# Altium PCB rhd_board_rev1_right_rules_copy.PcbDoc
Units mm, origin at the board's own origin, x right, y up, seen from the top; angles counter-clockwise.
Board outline 12.85 x 20.85 mm, 3 copper layers (Top Layer, GND, Bottom layer), stack 0.13 mm thick; 28 components, 58 nets, 184 pads, 82 vias.
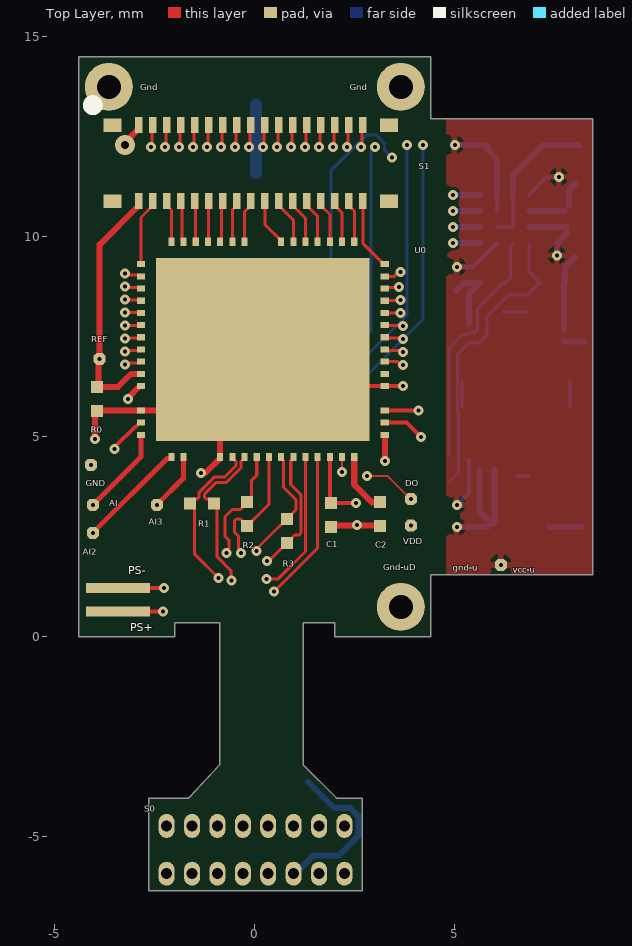
[diagram p0: Top Layer view]
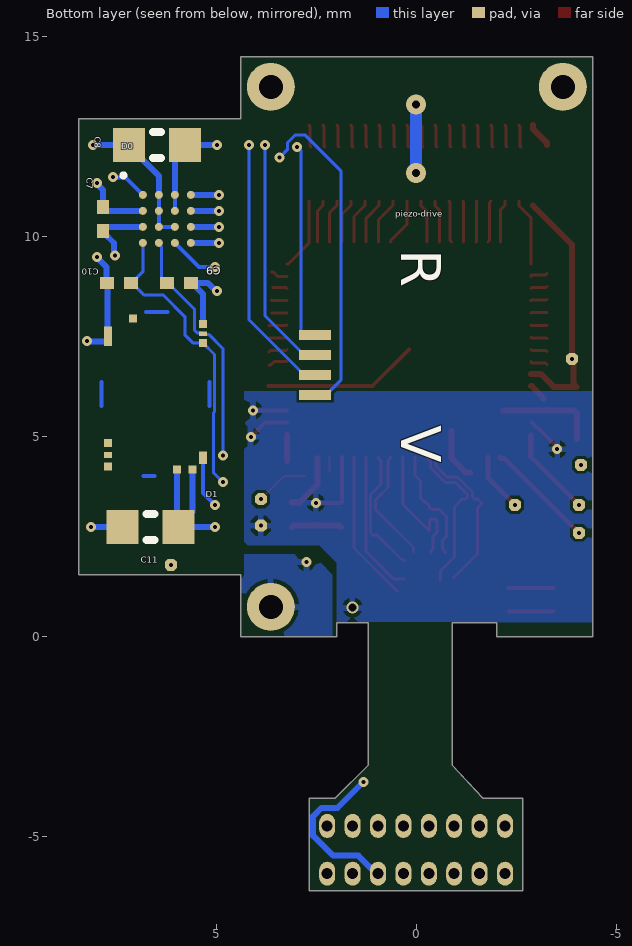
[diagram p1: Bottom layer view, seen from below]
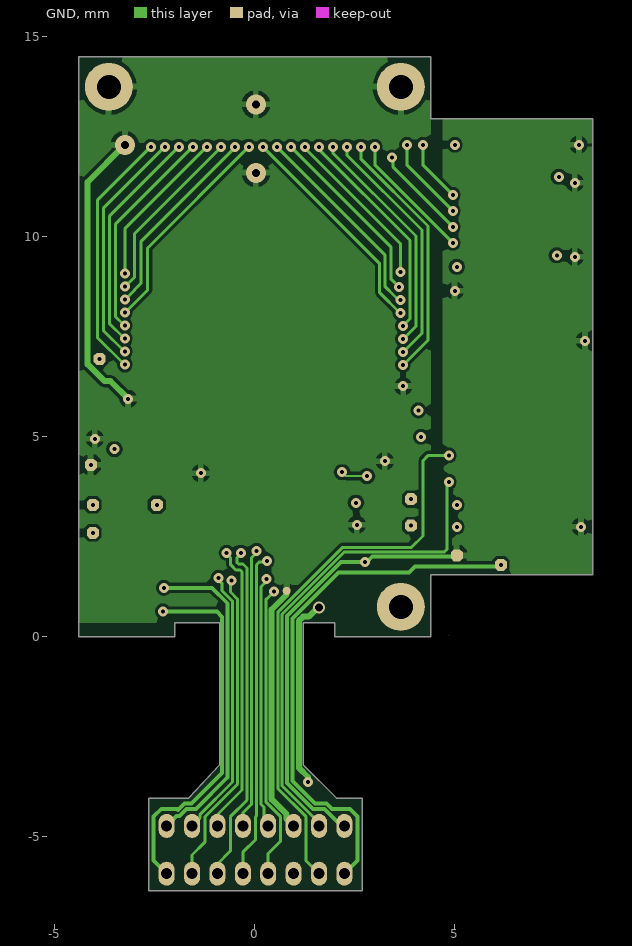
[diagram p2: GND]

## Layer stack, top to bottom
Top Layer: signal copper 0.012
Dielectric 1: core 0.022, FR-4, Dk 4.2
Adhesive 1: prepreg 0.025, Dk 4.2
GND: signal copper 0.012
Dielectric1: prepreg 0.025, Dk 4.2
Dielectric 1: core 0.022, Dk 4.2
Bottom layer: signal copper 0.012

## Board outline
-1.65,-4.03 -0.88,-3.201 -0.88,0.35 -2,0.35 -2,0 -4.4,0 -4.4,14.5 4.4,14.5 4.4,12.95 8.45,12.95 8.45,1.55 4.4,1.55 4.4,0 2,0 2,0.35 1.21,0.35 1.21,-3.201 2.039,-4.03 2.69,-4.03 2.69,-6.35 -2.65,-6.35 -2.65,-4.03
board region intan: -0.88,0.3 -0.88,0.35 -2,0.35 -2,0 -4.4,0 -4.4,14.5 4.4,14.5 4.4,0 2,0 2,0.35 1.21,0.35 1.21,0.3
board region intan-drive: 4.7,1.55 4.4,1.55 4.4,12.95 4.7,12.95
board region drive: 4.7,12.95 8.45,12.95 8.45,1.55 4.7,1.55
board region intan-omnetics: -0.88,-3.201 -0.88,0.3 1.21,0.3 1.21,-3.201 1.22,-3.211
board region omnetics: 1.22,-3.211 2.039,-4.03 2.69,-4.03 2.69,-6.35 -2.65,-6.35 -2.65,-4.03 -1.65,-4.03 -0.88,-3.201

## Design rules (kind name [scope] priority, off if disabled: settings)
Clearance [All] p1: gap=0.075 ignorepadtopadclearanceinfootprint=TRUE except(0.035: Track-Track)
ComponentClearance [All] p1: gap=0.102 collisioncheckmode=3 verticalgap=0.254 showdistances=TRUE
DiffPairsRouting DiffPair_DiffPairsRouting [InDifferentialPairClass('New Class')] p1: maxlimit=0.203 minlimit=0.051 mostfreqgap=0.102 toplayer_minwidth=0.05 toplayer_maxwidth=0.203 toplayer_prefwidth=0.102 midlayer2_minwidth=0.05 midlayer2_maxwidth=0.203 midlayer2_prefwidth=0.102 bottomlayer_minwidth=0.05 bottomlayer_maxwidth=0.203 bottomlayer_prefwidth=0.102 maxuncoupledlength=12.7
DiffPairsRouting [InDifferentialPairClass('All Differential Pairs')] p2: maxlimit=2.54 minlimit=0.127 mostfreqgap=0.127 toplayer_minwidth=0.076 toplayer_maxwidth=0.381 toplayer_prefwidth=0.254 midlayer2_minwidth=0.076 midlayer2_maxwidth=0.381 midlayer2_prefwidth=0.254 bottomlayer_minwidth=0.076 bottomlayer_maxwidth=0.381 bottomlayer_prefwidth=0.254 maxuncoupledlength=12.7
HoleToHoleClearance [All] p1: gap=0.225 allowstackedmicrovias=TRUE
LayerPairs [All] p1 off: enforce=TRUE
MatchedLengths DiffPair_MatchedLengths [InDifferentialPairClass('New Class')] p1: tolerance=25.4 checknetsindiffpair=TRUE checkdiffpairvsdiffpair=FALSE checkxsignals=FALSE checkothers=FALSE
MatchedLengths DiffPair_MatchedLengths_mosi [InDifferentialPair ('D_MOSI')] p2 off: tolerance=25.4 checknetsindiffpair=TRUE checkdiffpairvsdiffpair=FALSE checkxsignals=FALSE checkothers=FALSE
MinimumSolderMaskSliver [All] p1: minsoldermaskwidth=0.025
PasteMaskExpansion [All] p1 off: expansion=0
PermittedLayers [All] p1: toplayerpermitted=TRUE bottomlayerpermitted=TRUE
PlaneConnect [All] p1: pad.planeconnectstyle=Relief pad.reliefexpansion=0.508 pad.reliefentries=4 pad.reliefconductorwidth=0.254 pad.reliefairgap=0.254 via.planeconnectstyle=Direct via.reliefexpansion=0.508 via.reliefentries=4 via.reliefconductorwidth=0.254 via.reliefairgap=0.254
PolygonConnect [All] p1: connectstyle=Relief reliefconductorwidth=0.15 reliefentries=4 polygonreliefangle="90 Angle" airgapwidth=0.1
RoutingCorners [All] p1: cornerstyle=Round minsetback=2.54 maxsetback=2.54
RoutingVias [All] p1: holewidth=0.1 width=0.35 viastyle="Through Hole" minholewidth=0.1 minwidth=0.25 maxholewidth=0.2 maxwidth=0.5
SilkToSilkClearance [All] p1: silktosilkclearance=0.102
SilkToSolderMaskClearance [IsPad] p1 off: minsilkscreentomaskgap=0.102 clearancetoexposedcopper=TRUE
SolderMaskExpansion [All] p1 off: expansion=0.075
UnRoutedNet [All] p1: checkbadconnections=TRUE
Width Width_elect_net [InNetClass('electrode_net')] p1: maxlimit=0.15 minlimit=0.05 preferedwidth=0.075
Width Width_width [InNetClass('signal_net')] p2: maxlimit=0.15 minlimit=0.05 preferedwidth=0.075
Width Width_power [InNetClass('pow_net')] p3: maxlimit=0.3 minlimit=0.1 preferedwidth=0.2
Width Width_signal [InNetClass('All Nets')] p4: maxlimit=0.15 minlimit=0.05 preferedwidth=0.075
19 further rules are at their usual default settings.

## Classes and differential pairs
net class pow_net: GND NetC2_1 NetR0_2 STIM+ STIM- VCC VCC-udrive
net class signal_net: CS+ CS- MISO+ MISO- MOSI+ MOSI- NetAI2_1 NetAI3_1 NetAI_1 NetS1_B2 NetS1_B3 NetS1_B4 NetS1_B5 NetS1_B6 NetS1_B7 NetS1_B8 NetS1_B9 NetS1_B10 NetS1_B11 NetS1_B12 NetS1_B13 NetS1_B14 NetS1_B15 NetS1_B16 NetS1_B17 SCL SCLK+ SCLK- SDA
differential pair class "New Class": D_CS D_MISO D_MOSI D_SCLK
net class electrode_net: NetS1_B2 NetS1_B3 NetS1_B4 NetS1_B5 NetS1_B6 NetS1_B7 NetS1_B8 NetS1_B9 NetS1_B10 NetS1_B11 NetS1_B12 NetS1_B13 NetS1_B14 NetS1_B15 NetS1_B16 NetS1_B17 S0 S1 S2 S3 S4 S5 S6 S7 S24 S25 S26 S27 S28 S29 S30 S31
differential pair D_SCLK: +SCLK+ -SCLK-
differential pair D_CS: +CS+ -CS-
differential pair D_MOSI: +MOSI+ -MOSI-
differential pair D_MISO: +MISO+ -MISO-

## Components (designator, comment, footprint, x,y, rotation, side; value= is the part's Value field where it differs from the comment)
AI "PCB Test Point" TESTPOINT_SMALL#1 -4.05,3.3 r0 top
AI2 "PCB Test Point" TESTPOINT_SMALL#1 -4.05,2.6 r90 top
AI3 "PCB Test Point" TESTPOINT_SMALL#1 -2.45,3.3 r90 top
C1 "100nF" 0402-SMALL 1.898,3.04 r270 top
C2 "10nF" 0402-SMALL 3.123,3.07 r270 top
C7 "470n" CAPC0603X03L 7.85,10.45 r270 bottom
C8 "10u" CAPC1608X09L 6.5,12.3 r180 bottom
C9 "470n" CAPC0603X03L 5.95,8.85 r0 bottom
C10 "470n" CAPC0603X03L 7.45,8.85 r0 bottom
C11 "10u" CAPC1608X09L 6.663,2.75 r0 bottom
D0 "NSD-2101" BGA16C40P4X4_175X175X63 6.25,10.45 r180 bottom
D1 "NSE-5310_FC" NSE-5310_FC 7.157,4.07 r90 bottom
DO "PCB Test Point" TESTPOINT_SMALL#1 3.898,3.44 r90 top
GND "PCB Test Point" TESTPOINT_SMALL#1 -4.1,4.3 r90 top
gnd-u "PCB Test Point" TESTPOINT_SMALL#2 5.05,2.037 r90 top
piezo-drive "sql-rv-1.8-6-12" sql-rv-1.8-6-12 -1.51,10.235 r0 bottom
PS+ "2-2" KP-025-04 -3.42,0.633 r180 top
PS- "2-2" KP-025-04 -3.42,1.225 r180 top
R0 "0" 0201-SMALL -3.95,5.95 r90 top
R1 "100" 0201-SMALL -1.327,3.339 r0 top
R2 "100" 0201-SMALL -0.2,3.066 r270 top
R3 "100" 0201-SMALL 0.8,2.65 r270 top
REF "PCB Test Point" TESTPOINT_SMALL#3 -3.878,6.95 r90 top
S0 "Omnetics_PZN-16-DD" OMNETICS_PZN-16-DD 0.014,-5.35 r180 top
S1 "Molex 3.5mm Pitch Slimstack 34 pin connector" MOLEX_504618-3412 -0.1,11.842 r0 top
U0 "Intan Technologies RHD2132 chip" RHD2000_56PIN_COB 0.2,7.184 r0 top
vcc-u "PCB Test Point" TESTPOINT_SMALL#1 6.15,1.8 r90 top
VDD "PCB Test Point" TESTPOINT_SMALL#1 3.898,2.78 r90 top

## Footprints (in the part's own frame and the unit in brackets; to place one, negate y for a bottom-side part, rotate by r counter-clockwise, add the part's x,y. Pads: shape width x height; smd on the part's side, far side on the other; paste and mask are expansions set on the pad)
0201-SMALL [mm]
  rect 0.3x0.3 smd: 1(-0.3,0) 2(0.3,0)
0402-SMALL [mm]
  rect 0.3x0.3 smd: 1(-0.302,0.002) 2(0.298,0.002)
BGA16C40P4X4_175X175X63 [mm]
  round 0.2 smd: A1(-0.6,0.6) A2(-0.2,0.6) A3(0.2,0.6) A4(0.6,0.6) B1(-0.6,0.2) B2(-0.2,0.2) B3(0.2,0.2) B4(0.6,0.2) C1(-0.6,-0.2) C2(-0.2,-0.2) C3(0.2,-0.2) C4(0.6,-0.2) D1(-0.6,-0.6) D2(-0.2,-0.6) D3(0.2,-0.6) D4(0.6,-0.6)
  silkscreen extent -1.14,1.04 -1.04,1.14, body extent -0.87,-0.88 0.88,0.87, height 0.25
CAPC0603X03L [mm]
  rect 0.35x0.3 smd: 1(-0.3,0) 2(0.3,0)
  body extent -0.67,-0.35 0.67,0.35, height 0.33
CAPC1608X09L [mm]
  rect 0.8x0.85 smd: 1(-0.7,0) 2(0.7,0)
  silkscreen extent -0.1,-0.33 0.1,0.33, body extent -1.25,-0.58 1.25,0.58, height 0.95
KP-025-04 [mm]
  rect 1.6x0.25 smd: 1(0,0)
  body extent -0.9,-0.23 0.9,0.23, height 0.03
MOLEX_504618-3412 [mm]
  rect 0.455x0.33 smd paste-1000 mask+0.035: A(-3.455,0.95) B(-3.455,-0.95) C(3.455,0.95) D(3.455,-0.95)
  rect 0.18x0.4 smd paste+0 mask+0.035: B1(-2.8,-0.95) B2(-2.45,-0.95) B3(-2.1,-0.95) B4(-1.75,-0.95) B5(-1.4,-0.95) B6(-1.05,-0.95) B7(-0.7,-0.95) B8(-0.35,-0.95) B9(0,-0.95) B10(0.35,-0.95) B11(0.7,-0.95) B12(1.05,-0.95) B13(1.4,-0.95) B14(1.75,-0.95) B15(2.1,-0.95) B16(2.45,-0.95) B17(2.8,-0.95) T1(-2.8,0.95) T2(-2.45,0.95) T3(-2.1,0.95) T4(-1.75,0.95) T5(-1.4,0.95) T6(-1.05,0.95) T7(-0.7,0.95) T8(-0.35,0.95) T9(0,0.95) T10(0.35,0.95) T11(0.7,0.95) T12(1.05,0.95) T13(1.4,0.95) T14(1.75,0.95) T15(2.1,0.95) T16(2.45,0.95) T17(2.8,0.95)
  silkscreen extent -4.07,1.33 -3.82,1.57, body extent -4.05,-1 4.05,1, height 0.58
NSE-5310_FC [mm]
  rect 0.2x0.2 smd: 3(0.19,0.56) 5(0.781,0.56) 7(3.295,0.56) 8(3.484,0.56) 8(3.587,0.56) 9(3.888,-0.057) 11(3.75,-1.807) 13(3.28,-1.807) 18(0.351,-1.807) 18(0.468,-1.807) 19(0.112,-1.549) 19(0.112,-1.161)
  rect 0.15x0.2 smd: 4(0.48,0.56)
  rect 0.116x0.116 smd: 8(3.484,0.56) 18(0.401,-1.807)
  rect 0.116x0.2 smd: 12(3.51,-1.807)
  Top Layer lines w0.1: 1.7,-1.973 2.3,-1.973 ; 4.05,-0.923 4.05,-0.386 ; -0.05,-0.6 -0.05,-0.323 ; 1.7,0.727 2.3,0.727
  body extent -0.2,-2.12 4.2,0.88, height 1.02
OMNETICS_PZN-16-DD [mm]
  oval 0.4x0.6 hole 0.275 mask+0.05: B1(2.219,0.571) B2(1.584,0.571) B3(0.949,0.571) B4(0.314,0.571) B5(-0.321,0.571) B6(-0.956,0.571) B7(-1.591,0.571) B8(-2.226,0.571) T1(2.219,-0.622) T2(1.584,-0.622) T3(0.949,-0.622) T4(0.314,-0.622) T5(-0.321,-0.622) T6(-0.956,-0.622) T7(-1.591,-0.622) T8(-2.226,-0.622)
RHD2000_56PIN_COB [mil]
  rect 8x6 smd paste+0: 1(-120,84) 2(-120,72) 3(-120,60) 4(-120,48) 5(-120,36) 6(-120,24) 7(-120,12) 8(-120,0) 9(-120,-12) 10(-120,-24) 11(-120,-36) 12(-120,-60) 13(-120,-72) 14(-120,-84) 29(120,-84) 30(120,-72) 31(120,-60) 32(120,-36) 33(120,-24) 34(120,-12) 35(120,0) 36(120,12) 37(120,24) 38(120,36) 39(120,48) 40(120,60) 41(120,72) 42(120,84)
  rect 6x8 smd paste+0: 15(-90,-106) 16(-78,-106) 17(-42,-106) 18(-30,-106) 19(-18,-106) 20(-6,-106) 21(6,-106) 22(18,-106) 23(30,-106) 24(42,-106) 25(54,-106) 26(66,-106) 27(78,-106) 28(90,-106) 43(90,106) 44(78,106) 45(66,106) 46(54,106) 47(42,106) 48(30,106) 49(18,106) 50(-18,106) 51(-30,106) 52(-42,106) 53(-54,106) 54(-66,106) 55(-78,106) 56(-90,106)
  rect 210x180 smd paste+0: CENTER(0,0)
sql-rv-1.8-6-12 [mm]
  rect 0.8x0.25 smd: P1-1(4.05,2.685) P1-2(4.05,4.185) P2-1(4.05,3.185) P2-2(4.05,3.685)
  Top Layer region: 0.05,0
  Top Layer region: 0.05,0
  body extent 0.05,0 4.55,6, height 2.77
TESTPOINT_SMALL#1 [mm]
  oct 0.3x0.3 hole 0.1: 1(0,0)
TESTPOINT_SMALL#2 [mm]
  oct 0.3x0.3 on Mid2: 1(0,0)
TESTPOINT_SMALL#3 [mm]
  oct 0.3x0.3 hole 0.1 paste+0.1: 1(0,0)

## Part data
AI AI2 AI3 DO GND gnd-u REF vcc-u VDD: library part TESTPOINT_SMALL, DeviceName=_SMALL, DeviceSetName=TESTPOINT, GateName_1=TP$1, LibraryName=RHD2000_eval_board, Package=TESTPOINT_SMALL, SymbolName_1=TESTPOINT
C1: library part C_0402, Package=0402, Supplier Part Number 1=963-TMK063ABJ104KP-F, DeviceName=_0402, DeviceSetName=C, GateName_1=C, LibraryName=RHD2000_eval_board, Supplier 1=Mouser, SymbolName_1=C
C2: library part C_0402, Package=0402, Supplier Part Number 1=963-TMK063BJ103KP-F, DeviceName=_0402, DeviceSetName=C, GateName_1=C, LibraryName=RHD2000_eval_board, Supplier 1=Mouser, SymbolName_1=C
C7 C9 C10: library part Cap-0201, "Capacitor", Supplier Part Number 1=963-AMK063BJ474MP-F, LatestRevisionDate=10-Jul-2010, Publisher=RVS, Supplier 1=Mouser
C8 C11: library part Cap-0603, "Capacitor", Supplier Part Number 1=667-ECJ-1VB0J106M, LatestRevisionDate=10-Jul-2010, Publisher=RVS, Supplier 1=Mouser
piezo-drive: "Squiggle motor"
PS+ PS-: library part KP-025X04
R0: library part R_0402, Package=0402, Supplier Part Number 1=667-ERJ-1GN0R00C, DeviceName=_0402, DeviceSetName=R, GateName_1=R, LibraryName=RHD2000_eval_board, Supplier 1=Mouser, SymbolName_1=R
R1 R2 R3: library part R_0402, Package=0402, Supplier Part Number 1=755-UCR006YVPFLR100, DeviceName=_0402, DeviceSetName=R, GateName_1=R, LibraryName=RHD2000_eval_board, Supplier 1=Mouser, SymbolName_1=R
S0: Package=OMNETICS_PZN-12-AA, DeviceSetName=RHD2000-CABLE-DAQ-SIDE, GateName_1=A, LibraryName=RHD2000_eval_board, SymbolName_1=RHD2000-CABLE
S1: library part MOLEX_504618-3412, Package=OMNETICS_A79024, Supplier Part Number 1=538-504618-3410, DeviceSetName=OMNETICS_A79024, GateName_1=A, LibraryName=RHD2000_eval_board, Supplier 1=Mouser, SymbolName_1=OMNETICS_A7902X
U0: library part RHD2132_COB, Package=RHD2000_56PIN_COB, DeviceName=_COB, DeviceSetName=RHD2132, GateName_1=A, LibraryName=RHD2000, SymbolName_1=RHD2132

## Free pads (board coordinates)
  round 1.2 hole 0.6: 2(-3.65,13.75) 2(3.65,0.75) 2(3.65,13.75)
  round 0.2 on Mid2: 6(0.795,1.15)

## Via types
v1: diameter 0.25, hole 0.1, Top Layer to GND, tented both sides, 46 vias
v2: diameter 0.25, hole 0.1, Top Layer to Bottom layer, 17 vias
v3: diameter 0.25, hole 0.1, GND to Bottom layer, 6 vias
v4: diameter 0.25, hole 0.1, GND to Bottom layer, tented both sides, 4 vias
v5: diameter 0.25, hole 0.1, Top Layer to GND, 4 vias
v6: diameter 0.5, hole 0.2, GND to Bottom layer, tented both sides, 2 vias
v7: diameter 0.3, hole 0.2, GND to Bottom layer, tented both sides, 1 vias
v8: diameter 0.25, hole 0.1, Top Layer to Bottom layer, tented both sides, 1 vias
v9: diameter 0.5, hole 0.2, Top Layer to GND, tented both sides, 1 vias

## Nets (pads, with @x,y where several pads share a name; then routed paths per layer and width w, separated by ;. In a path a pad name is that pad's centre, name@x,y a point inside that pad or via, vN(x,y) a via of type N, cw(c..) or ccw(c..) an arc to the next point about the centre after c; other vN are vias at no path point)
1-1: D0.D4 piezo-drive.P1-1 | length 8.7
  GND w0.075: v2(3,12.25) 3,11.8 v2(4.95,9.85)
  Bottom layer w0.075: piezo-drive.P1-1@2.819,7.554 2.902,7.637 2.902,12.154 2.998,12.25 v2(3,12.25)
  Bottom layer w0.15: v2(4.95,9.85) D0.D4
1-2: D0.C4 piezo-drive.P1-2 | length 11
  GND w0.075: v2(3.432,11.98) 3.458,11.954 3.458,11.742 v2(4.95,10.25)
  Bottom layer w0.075: piezo-drive.P1-2@2.25,6.05 2.25,6.065 1.9,6.415 1.9,11.65 2.8,12.55 3.036,12.55 3.237,12.348 3.237,12.174 v2(3.432,11.98)
  Bottom layer w0.15: v2(4.95,10.25) D0.C4
2-1: D0.B4 piezo-drive.P2-1 | length 8.4
  GND w0.075: v2(3.8,12.3) 3.8,11.8 v2(4.95,10.65)
  Bottom layer w0.075: piezo-drive.P2-1@2.85,7.085 3.8,8.035 v2(3.8,12.3)
  Bottom layer w0.15: v2(4.95,10.65) D0.B4
2-2: D0.A4 piezo-drive.P2-2 | length 8.6
  GND w0.075: v2(4.2,12.3) 4.2,11.8 v2(4.95,11.05)
  Bottom layer w0.075: piezo-drive.P2-2@2.8,6.535 4.2,7.935 v2(4.2,12.3)
  Bottom layer w0.15: v2(4.95,11.05) D0.A4
CS+: R1.2 S0.B2 U0.19 | length 11.9
  Top Layer w0.076: v1(-0.578,1.413) -0.594,1.429 -0.594,1.652 -0.943,2.001 -0.943,3.255 R1.2 -1.139,3.451 -1.219,3.451 -1.263,3.495 -1.263,3.562 -0.962,3.864 -0.707,3.864 -0.346,4.224 -0.346,4.383 -0.302,4.428 -0.295,4.428 -0.257,4.466 U0.19
  GND w0.075: S0.B2 -1.57,-5.453 -1.25,-5.134 -1.25,-4.502 -0.432,-3.684 -0.432,0.942 -0.61,1.12 -0.61,1.381 v1(-0.578,1.413)
CS-: R1.1 S0.T2 U0.18 | length 10.8
  Top Layer w0.075: R1.1 -1.514,3.226 -1.514,2.074 v1(-0.91,1.47)
  Top Layer w0.076: R1.1 -1.515,3.451 -1.435,3.451 -1.39,3.495 -1.39,3.615 -1.014,3.991 -0.759,3.991 -0.473,4.277 -0.473,4.383 -0.518,4.428 -0.524,4.428 -0.562,4.466 U0.18
  GND w0.075: S0.T2 -1.376,-4.534 -1.376,-4.45 -0.558,-3.632 -0.558,0.89 -0.816,1.147 -0.816,1.328 -0.91,1.423 v1(-0.91,1.47)
GND: C1.2 C2.2 GND.1 pad.2@3.65,13.75 pad.2@-3.65,13.75 pad.6 R0.1 S0.T6 S1.T1 U0.11 U0.12 U0.17 U0.29 U0.32 U0.CENTER | length 26
  Top Layer w0.1: U0.CENTER 1.114,6.27 U0.32 v1(3.71,6.27)
  Top Layer w0.15: v5(-4,4.95) -4,5.586 -3.926,5.66 U0.12 U0.CENTER@-2.148,5.66 ; v9(-3.25,12.3) -3.25,12.352 -2.9,12.702 S1.T1 ; v1(-3.168,5.95) -3.168,5.975 -2.873,6.27 U0.11 ; v5(-1.346,4.092) -1.327,4.111 -1.222,4.111 -0.867,4.466 U0.17 U0.CENTER@-0.867,5.15 ; C1.2 1.939,2.781 2.531,2.781 v5(2.55,2.8) 2.564,2.786 3.086,2.786 C2.2@3.12,2.752 ; U0.29@3.249,5.05 v5(3.25,4.392) v5(3.25,4.392)
  GND w0.15: v9(-3.25,12.3) -4.178,11.372 -4.178,6.813 -3.756,6.391 -3.609,6.391 v1(-3.168,5.95) ; pad.6 0.795,1.057 0.423,0.684 0.423,-4.065 0.795,-4.438 0.795,-4.553 S0.T6
  Bottom layer w0.3: v6(0.025,11.597) v6(0.025,13.31)
GND-udrive: C7.1 C8.1 C9.1 C10.2 C11.2 D0.A2 D0.B1 D0.B2 D0.C2 D0.C3 D1.7 D1.8 D1.11 gnd-u.1 pad.2@3.65,0.75 S0.T8 | length 21.3
  GND w0.1: S0.T8 2.164,-4.728 1.739,-4.303 1.453,-4.303 0.807,-3.657 0.807,0.52 2.157,1.869 2.801,1.869 2.936,2.004 5.004,2.004 gnd-u.1@5.05,2.05
  Bottom layer w0.1: v3(5,8.65) v3@5.027,8.65 ; D0.C3 D0.C2@6.463,10.25 ; D0.C2 6.45,10.637 D0.B2@6.463,10.65 ; D0.B2 D0.A2 ; C8.1@7.2,12.275 C8.1 ; D1.7 D1.7@7.733,7.383 ; D1.8@7.716,7.65 D1.8@7.733,7.667 ; C10.2@7.733,8.833 C10.2@7.756,8.856 ; v3@8,9.485 v3(8,9.5) ; v3@8,11.322 v3(8,11.35) ; v3@8.233,7.383 v3(8.25,7.4)
  Bottom layer w0.15: v3@5.027,8.65 5.227,8.85 C9.1 ; D1.11 5.35,8.575 C9.1@5.625,8.85 ; D0.A2 6.45,11.525 C8.1@7.2,12.275 ; D0.B1@6.85,10.65 C7.1@7.75,10.65 ; C8.1@7.225,12.3 v3(8.1,12.3) ; C11.2 v4(8.15,2.75) ; D1.7@7.733,7.383 v3@8.233,7.383 ; D1.8@7.733,7.667 C10.2@7.733,8.833 ; C10.2@7.756,8.856 7.756,9.241 v3@8,9.485 ; C7.1@7.85,10.8 7.85,11.172 v3@8,11.322
  other v4: 2.76,1.869
MISO+: S0.B5 U0.25 | length 11.3
  Top Layer w0.076: v1(0.479,1.13) 1.572,2.222 U0.25 U0.25@1.586,4.477
  GND w0.075: S0.B5 0.335,-5.415 0.648,-5.103 0.648,-4.499 0.275,-4.126 0.275,0.94 0.289,0.94 v1(0.479,1.13)
MISO-: S0.T5 U0.24 | length 9.9
  Top Layer w0.075: v1(0.297,1.44) 0.574,1.44 1.267,2.133 U0.24
  GND w0.075: v1(0.297,1.44) 0.297,1.393 0.16,1.256 0.16,0.99 0.149,-4.178 0.23,-4.259 0.23,-4.623 S0.T5
MOSI+: R3.2 S0.B4 U0.23 | length 11.3
  Top Layer w0.076: v1(0.3,1.9) 0.333,1.933 0.383,1.933 0.991,2.541 1.102,2.541 1.156,2.595 1.156,3.551 0.898,3.809 0.898,4.403 0.962,4.466 U0.23
  GND w0.075: S0.B4 -0.3,-5.388 0.023,-5.065 0.023,-4.499 0.039,-4.482 0.039,1.802 0.104,1.867 0.267,1.867 v1(0.3,1.9)
MOSI-: R3.1 S0.T4 U0.22 | length 9.9
  Top Layer w0.076: v1@0.081,2.119 0.081,2.231 1.029,3.179 1.029,3.427 0.721,3.735 0.721,4.403 0.657,4.466 U0.22
  GND w0.075: S0.T4 -0.3,-4.404 -0.087,-4.191 -0.087,1.969 v1@0.06,2.116
  other v1: 0.048,2.15
NetAI2_1: AI2.1 U0.15 | length 2.8
  Top Layer w0.127: AI2.1 -2.197,4.453 -2.099,4.453 -2.077,4.476 U0.15@-2.077,4.492
NetAI3_1: AI3.1 U0.16 | length 1.5
  Top Layer w0.127: AI3.1 -1.781,3.969 U0.16
NetAI_1: AI.1 U0.14 | length 2.2
  Top Layer w0.127: AI.1@-4.05,3.339 -4.011,3.339 -2.848,4.502 -2.848,5.038 U0.14@-2.861,5.05
NetC2_1: C2.1 U0.28 | length 1.5
  Top Layer w0.152: U0.28@2.486,4.466 2.486,3.804 2.924,3.366 C2.1@3.13,3.366
NetDO_1: DO.1 U0.27 | length 2.4
  Top Layer w0.05: v1(2.181,4.116) U0.27 ; v1(2.801,4.017) 3.321,4.017 DO.1
  GND w0.05: v1(2.181,4.116) 2.28,4.017 v1(2.801,4.017)
NetR0_2: R0.2 REF.1 S1.B1 U0.10 | length 6.3
  Top Layer w0.15: S1.B1@-2.9,10.782 -3.878,9.804 REF.1 -3.914,6.914 -3.914,6.325 -3.997,6.242 -3.989,6.25 -3.42,6.25 -3.096,6.573 -2.849,6.573 U0.10
NetS1_B2: S1.B2 U0.1 | length 1.7
  Top Layer w0.075: U0.1 -2.848,10.484 -2.55,10.782 S1.B2
NetS1_B3: S1.B3 U0.56 | length 1.1
  Top Layer w0.075: S1.B3 -2.2,10.782 -2.086,10.668 U0.56
NetS1_B4: S1.B4 U0.55 | length 1
  Top Layer w0.075: S1.B4 -1.816,10.858 -1.816,9.911 U0.55
NetS1_B5: S1.B5 U0.54 | length 1
  Top Layer w0.075: S1.B5 -1.488,10.88 -1.488,9.888 U0.54
NetS1_B6: S1.B6 U0.53 | length 1
  Top Layer w0.075: U0.53 -1.161,9.887 -1.161,10.881 S1.B6
NetS1_B7: S1.B7 U0.52 | length 1
  Top Layer w0.075: U0.52 -0.833,9.91 -0.833,10.859 S1.B7
NetS1_B8: S1.B8 U0.51 | length 1.1
  Top Layer w0.075: U0.51 -0.562,10.67 -0.45,10.782 S1.B8
NetS1_B9: S1.B9 U0.50 | length 1.1
  Top Layer w0.075: U0.50 -0.257,10.625 -0.1,10.782 S1.B9
NetS1_B10: S1.B10 U0.49 | length 1.2
  Top Layer w0.075: S1.B10 0.25,10.309 0.657,9.902 U0.49
NetS1_B11: S1.B11 U0.48 | length 1.2
  Top Layer w0.075: S1.B11 0.6,10.782 0.962,10.42 U0.48
NetS1_B12: S1.B12 U0.47 | length 1.1
  Top Layer w0.075: S1.B12 0.95,10.782 1.267,10.465 U0.47
NetS1_B13: S1.B13 U0.46 | length 1.1
  Top Layer w0.075: S1.B13 1.3,10.782 1.572,10.51 U0.46
NetS1_B14: S1.B14 U0.45 | length 1.1
  Top Layer w0.075: S1.B14 1.65,10.782 1.876,10.556 U0.45
NetS1_B15: S1.B15 U0.44 | length 1.1
  Top Layer w0.075: S1.B15 2,10.782 2.181,10.601 U0.44
NetS1_B16: S1.B16 U0.43 | length 1.1
  Top Layer w0.075: S1.B16 2.35,10.782 2.486,10.646 U0.43
NetS1_B17: S1.B17 U0.42 | length 1.8
  Top Layer w0.075: S1.B17 2.7,9.84 3.223,9.318 U0.42
S0: S1.T2 U0.9 | length 7.3
  Top Layer w0.075: v1(-3.25,6.808) -3.217,6.842 -2.885,6.842 U0.9 ; v1(-2.6,12.25) -2.575,12.275 -2.575,12.767 S1.T2
  GND w0.075: v1(-3.25,6.808) -3.261,6.808 -3.938,7.485 -3.938,10.912 v1(-2.6,12.25)
S1: S1.T3 U0.8 | length 7
  Top Layer w0.075: v1(-3.25,7.133) -3.225,7.159 -2.873,7.159 U0.8 ; v1(-2.25,12.25) -2.225,12.275 -2.225,12.767 S1.T3
  GND w0.075: v1(-3.25,7.133) -3.261,7.133 -3.788,7.66 -3.788,10.712 v1(-2.25,12.25)
S2: S1.T4 U0.7 | length 6.7
  Top Layer w0.075: v1(-3.25,7.458) -3.235,7.474 -2.863,7.474 U0.7 ; v1(-1.9,12.25) -1.875,12.275 -1.875,12.767 S1.T4
  GND w0.075: v1(-3.25,7.458) -3.261,7.458 -3.638,7.835 -3.638,10.512 v1(-1.9,12.25)
S3: S1.T5 U0.6 | length 6.3
  Top Layer w0.075: v1(-3.25,7.783) -3.245,7.789 -2.853,7.789 U0.6 ; v1(-1.55,12.25) -1.525,12.275 -1.525,12.767 S1.T5
  GND w0.075: v1(-3.25,7.783) -3.261,7.783 -3.488,8.01 -3.488,10.312 v1(-1.55,12.25)
S4: S1.T6 U0.2 | length 5
  Top Layer w0.075: v1(-3.25,9.084) -3.217,9.05 -2.885,9.05 U0.2 ; v1(-1.2,12.25) -1.175,12.275 -1.175,12.767 S1.T6
  GND w0.075: v1(-3.25,9.084) -3.25,10.2 v1(-1.2,12.25)
S5: S1.T7 U0.3 | length 5.5
  Top Layer w0.075: v1(-3.25,8.758) -3.225,8.733 -2.873,8.733 U0.3 ; v1(-0.85,12.25) -0.825,12.275 -0.825,12.767 S1.T7
  GND w0.075: v1(-3.25,8.758) -3.25,8.846 -3.152,8.846 -3.012,8.985 -3.012,10.073 -0.85,12.235 v1(-0.85,12.25)
S6: S1.T8 U0.4 | length 5.9
  Top Layer w0.076: v1(-3.25,8.433) -3.235,8.418 -2.863,8.418 U0.4 ; v1(-0.5,12.25) -0.475,12.275 -0.475,12.767 S1.T8
  GND w0.076: v1(-3.25,8.433) -3.163,8.52 -3.151,8.52 -3.012,8.66 -3.012,8.672 -2.85,8.833 -2.85,9.875 -0.5,12.225 v1(-0.5,12.25)
S7: S1.T9 U0.5 | length 6.4
  Top Layer w0.075: v1(-3.25,8.108) -3.245,8.103 -2.853,8.103 U0.5 ; v1(-0.15,12.25) -0.125,12.275 -0.125,12.767 S1.T9
  GND w0.075: v1(-3.25,8.108) -3.239,8.108 -2.678,8.67 -2.678,9.722 v1(-0.15,12.25)
S24: S1.T10 U0.38 | length 6.5
  Top Layer w0.075: v1(0.2,12.25) 0.225,12.275 0.225,12.767 S1.T10 ; U0.38 v1(3.639,8.098)
  GND w0.075: v1(0.2,12.25) 3.123,9.327 3.123,8.604 3.629,8.098 v1(3.639,8.098)
S25: S1.T11 U0.39 | length 6.1
  Top Layer w0.075: v1(0.55,12.25) 0.575,12.275 0.575,12.767 S1.T11 ; U0.39 3.258,8.413 3.629,8.413 v1(3.639,8.423)
  GND w0.075: v1(0.55,12.25) 3.25,9.55 3.25,8.764 3.503,8.511 3.505,8.511 3.592,8.423 v1(3.639,8.423)
S26: S1.T12 U0.40 | length 5.6
  Top Layer w0.075: v1(0.9,12.25) 0.925,12.275 0.925,12.767 S1.T12 ; U0.40 3.268,8.728 3.581,8.728 v1(3.602,8.748)
  GND w0.075: v1(0.9,12.25) 3.4,9.75 3.4,8.95 v1(3.602,8.748)
S27: S1.T13 U0.41 | length 5.1
  Top Layer w0.075: v1(1.25,12.25) 1.275,12.275 1.275,12.767 S1.T13 ; U0.41 3.486,9.013 3.592,9.119 v1(3.639,9.119)
  GND w0.075: v1(1.25,12.25) 1.25,12.218 3.639,9.829 v1(3.639,9.119)
S28: S1.T14 U0.37 | length 6.5
  Top Layer w0.075: v1(1.6,12.25) 1.625,12.275 1.625,12.767 S1.T14 ; U0.37 3.258,7.783 3.69,7.783 v1(3.7,7.773)
  GND w0.075: v1(1.6,12.25) 1.6,12.188 3.877,9.911 3.877,7.95 v1(3.7,7.773)
S29: S1.T15 U0.36 | length 6.8
  Top Layer w0.075: v1(1.95,12.25) 1.975,12.275 1.975,12.767 S1.T15 ; U0.36 3.268,7.469 3.68,7.469 v1(3.7,7.448)
  GND w0.075: v1(1.95,12.25) 1.95,12.096 4.027,10.019 4.027,7.764 3.711,7.448 v1(3.7,7.448)
S30: S1.T16 U0.35 | length 7.1
  Top Layer w0.075: v1(2.3,12.25) 2.325,12.275 2.325,12.767 S1.T16 ; U0.35 3.278,7.154 3.67,7.154 v1(3.7,7.123)
  GND w0.075: v1(2.3,12.25) 2.3,12.047 4.177,10.17 4.177,7.589 3.711,7.123 v1(3.7,7.123)
S31: S1.T17 U0.34 | length 7.5
  Top Layer w0.075: v1(2.65,12.25) 2.675,12.275 2.675,12.767 S1.T17 ; U0.34 3.572,6.879 3.653,6.798 v1(3.7,6.798)
  GND w0.075: v1(2.65,12.25) 2.65,11.949 4.327,10.272 4.327,7.414 3.711,6.798 v1(3.7,6.798)
SCL: C10.1 D0.D1 D1.13 S0.T7 | length 19.7
  GND w0.075: S0.T7 1.605,-4.649 0.685,-3.729 0.685,0.571 2.241,2.127 4.739,2.127 4.81,2.198 4.81,3.833 v3(4.85,3.873)
  Bottom layer w0.075: v3(4.85,3.873) 5.088,4.111 5.088,5.596 5.061,5.623 5.061,7.061 D1.13 5.6,7.35 5.8,7.55 5.8,8.003 6.347,8.55 6.825,8.55 7.125,8.85 6.85,9.125 D0.D1
SCLK+: R2.2 S0.B3 U0.21 | length 12
  Top Layer w0.076: v1(-0.35,2.1) -0.35,2.147 -0.408,2.205 -0.408,2.514 -0.508,2.613 -0.508,2.902 -0.463,2.947 -0.357,2.947 -0.312,2.902 -0.312,2.654 0.352,3.318 U0.21
  GND w0.075: S0.B3 -0.935,-5.678 -0.612,-5.356 -0.612,-4.499 -0.197,-4.083 -0.197,1.719 -0.298,1.82 -0.406,1.82 -0.45,1.864 -0.45,1.969 -0.35,2.069 v1(-0.35,2.1)
SCLK-: R2.1 S0.T3 U0.20 | length 10.2
  Top Layer w0.076: v1(-0.705,2.1) -0.705,2.147 -0.646,2.205 -0.646,2.415 -0.746,2.515 -0.746,3.001 -0.562,3.185 -0.357,3.185 -0.312,3.229 -0.312,3.276 -0.211,3.377 -0.189,3.377 -0.088,3.477 -0.088,3.904 0.048,4.04 U0.20
  GND w0.075: S0.T3 -0.935,-4.439 -0.322,-3.827 -0.322,1.626 -0.366,1.67 -0.475,1.67 -0.605,1.8 -0.605,1.969 -0.705,2.069 v1(-0.705,2.1)
SDA: C9.2 D0.D2 D1.12 S0.B7 | length 20.2
  GND w0.075: S0.B7 1.275,-5.592 1.275,-4.973 1.283,-4.966 1.283,-4.498 0.575,-3.79 0.575,0.616 2.195,2.237 3.916,2.237 4.201,2.522 4.201,4.403 4.336,4.537 v4(4.85,4.537)
  Bottom layer w0.075: v4(4.85,4.537) 4.85,7.209 5.203,7.563 5.332,7.563 5.37,7.601 5.49,7.601 5.563,7.673 5.563,8.193 6.219,8.85 C9.2 6.275,8.85 6.387,8.962 6.387,9.753 6.45,9.817 D0.D2 ; C9.2@6.25,8.805 C9.2@6.25,8.833
STIM+: PS+.1 S0.B1 | length 10.3
  Top Layer w0.1: PS+.1 v1(-2.3,0.633)
  GND w0.1: v1(-2.3,0.633) -0.948,0.633 -0.816,0.501 -0.816,-3.406 -1.578,-4.168 -1.76,-4.168 -1.923,-4.332 -1.923,-4.303 -2.339,-4.303 -2.53,-4.494 -2.53,-5.596 S0.B1
STIM-: PS-.1 S0.T1 | length 9.3
  Top Layer w0.1: PS-.1 v1(-2.275,1.225)
  GND w0.1: v1(-2.275,1.225) -1.066,1.225 -0.681,0.839 -0.681,-3.511 -1.473,-4.303 -1.704,-4.303 -1.883,-4.482 -1.959,-4.482 S0.T1
VCC: C1.1 S0.B6 U0.13 U0.26 U0.30 U0.31 VDD.1 | length 13.5
  Top Layer w0.1: v2(-3.509,4.691) -3.481,4.719 -3.481,4.773 -3.001,5.252 -2.977,5.252 -2.873,5.355 U0.13@-2.861,5.355 ; U0.26 1.876,3.366 C1.1 1.91,3.352 v8(2.527,3.352) ; U0.30 3.795,5.355 v2(4.15,5) ; U0.31 v2(4.091,5.66)
  GND w0.15: v4(1.33,-3.63) 1.33,-3.504 1.102,-3.277 1.102,0.398 1.209,0.504 1.343,0.504 1.569,0.73 v7(1.61,0.73)
  Bottom layer w0.15: S0.B6 1.01,-5.921 1.46,-5.471 2.092,-5.471 2.59,-4.973 2.59,-4.483 2.385,-4.278 1.988,-4.278 1.34,-3.63 v4(1.33,-3.63)
VCC-udrive: C7.2 C8.2 C11.1 D0.A1 D0.A3 D0.B3 D0.C1 D0.D3 D1.18 D1.19 S0.B8 vcc-u.1 | length 24.8
  GND w0.1: S0.B8 2.565,-5.596 2.565,-4.494 2.374,-4.303 1.93,-4.303 1.795,-4.168 1.509,-4.168 0.942,-3.602 0.942,0.464 2.088,1.61 3.849,1.61 4.002,1.762 6.112,1.762 vcc-u.1
  Bottom layer w0.1: v2(5.05,3.3) 5.35,3.6 D1.18@5.35,4.421 ; v2(5.05,9.25) 5.45,9.25 D0.D3 ; D1.19@5.607,4.182 D1.19@5.613,4.176 ; C11.1@5.812,2.75 C11.1@5.9,2.838 ; C11.1@5.963,2.8 C11.1@5.995,2.832 ; D1.19@5.995,4.177 D1.19@6,4.182 ; D0.B3 D0.A3 ; D0.C1 D0.C1@6.859,10.241 ; D0.A1 7.281,11.481 7.581,11.481 v2(7.6,11.5) ; v2(7.55,9.539) v2@7.569,9.558 ; C7.2@7.81,10.085 C7.2@7.81,10.207
  Bottom layer w0.15: v2(5,12.3) C8.2 ; v2(5.05,2.75) C11.1@5.812,2.75 ; D1.19@5.613,4.176 5.613,3.125 C11.1@5.9,2.838 ; C8.2@5.8,12.201 6.05,11.951 D0.A3 ; C11.1@5.995,2.832 D1.19@5.995,4.177 ; D0.C1@6.859,10.241 7.776,10.241 C7.2@7.81,10.207 ; v2@7.569,9.558 7.569,9.844 C7.2@7.81,10.085
pads on no net: D1.3 D1.4 D1.5 D1.9 S1.A S1.B S1.C S1.D U0.33

## Polygon pours and split planes (outlines as drawn)
GND on GND "GND" (solid, remove dead copper, pour order 2): -4.4,0.35 2,0.35 2,1.839 2.441,2.28 4.4,2.275 4.4,14.5 -4.4,14.5
GND-udrive on GND "GND-UDRIVE_L02_P006" (solid, remove dead copper, pour order 6): 4.7,1.55 8.45,1.55 8.45,12.95 4.7,12.95
VCC-udrive on Top Layer "VCC-UDRIVE" (solid, pour order 8): 8.45,12.95 8.45,1.55 4.7,1.55 4.7,12.95
GND-udrive on Bottom layer "GNDR" (solid, remove dead copper, pour order 10): 2.11,0 2.11,1.55 2.38,1.82 2.63,2.07 4.4,2.07 4.4,0
VCC on Bottom layer "GND" (solid, remove dead copper, pour order 14): -4.4,0.36 2,0.36 2,1.849 2.441,2.29 4.4,2.285 4.4,6.14 -4.4,6.14

## Keep-outs
GND:
  region: 4.85,0.034
  region: 4.85,0.034

## Silkscreen, mask and mechanical layers (free items; w line width, h text height)
Top Overlay:
  text "Gnd" at -2.86,13.67 h0.15
  text "Gnd" at 2.37,13.67 h0.15
  text "Gnd-uD" at 3.21,1.67 h0.15
Mechanical 5:
  lines w0.025: 3.476,4.8 14.311,4.8
construction:
  lines w0.025: -4.4,0 -4.4,14.5

## Text inside footprints (layer, text, board x,y; h text height)
piezo-drive: Bottom Overlay "R" at 0.39,9.685 h1 r90; Bottom Overlay "V" at 0.39,5.285 h1 r90; Bottom assembly "R" at 0.39,9.685 h1 r90; Bottom assembly "V" at 0.39,5.285 h1 r90; Bottom assembly "V" at 0.39,5.285 h1 r90; Bottom assembly "R" at 0.39,9.685 h1 r90